# Altium PCB BLERADAR-V11.PcbDoc
Units mm, origin at the board's own origin, x right, y up, seen from the top; angles counter-clockwise.
Board outline 60 x 23 mm, 2 copper layers (Top Layer, Bottom Layer), stack 0.999 mm thick; 65 components, 35 nets, 254 pads, 39 vias.
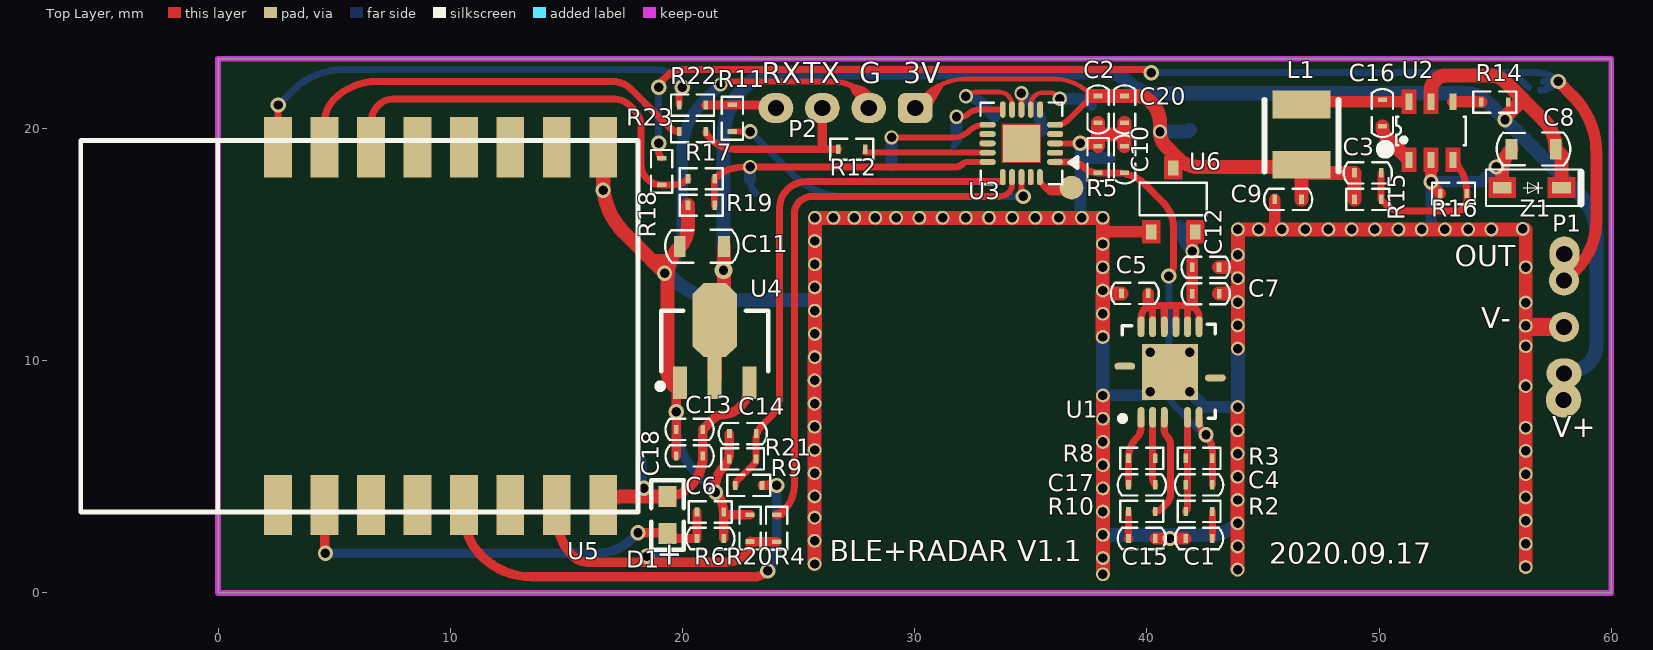
[diagram p0: Top Layer view]
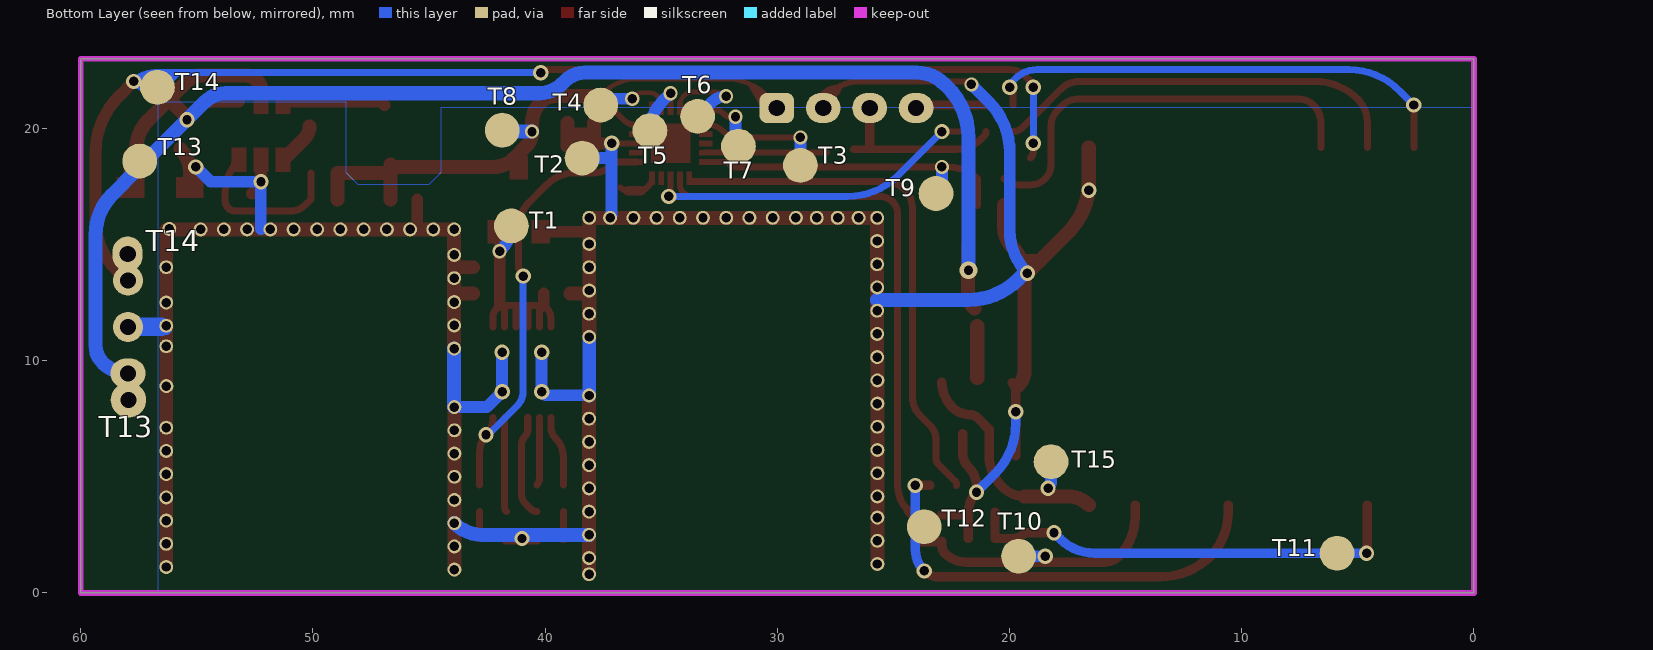
[diagram p1: Bottom Layer view, seen from below]

## Layer stack, top to bottom
Top Layer: signal copper 0.0356
Dielectric: core 0.928, FR-4, Dk 4.8
Bottom Layer: signal copper 0.0356

## Board outline
0,0 60,0 60,23 0,23

## Design rules (kind name [scope] priority, off if disabled: settings)
Clearance [All] p0: scope1count=1 scope1_0_kind=Board scope1_0_value=Board scope2count=1 scope2_0_kind=Board scope2_0_value=Board commentlength=0 gap=0.254
Clearance [All] p1: gap=0.254
ComponentClearance [All] p0: scope1count=1 scope1_0_kind=Board scope1_0_value=Board scope2count=1 scope2_0_kind=Board scope2_0_value=Board commentlength=0 gap=0.254 collisioncheckmode=3
ComponentClearance [All] p1: gap=0.254 collisioncheckmode=3 verticalgap=0.254
DiffPairsRouting [All] p0: scope1count=1 scope1_0_kind=Board scope1_0_value=Board scope2count=1 scope2_0_kind=Board scope2_0_value=Board commentlength=0
FanoutControl Fanout_BGA [All] p0 off: scope1count=1 scope1_0_kind=Board scope1_0_value=Board scope2count=1 scope2_0_kind=Board scope2_0_value=Board commentlength=69 // Protel DXP Scope 1 Expression Was: IsBGA   Fanout_BGA (Default Rule)
FanoutControl Fanout_LCC [All] p0 off: scope1count=1 scope1_0_kind=Board scope1_0_value=Board scope2count=1 scope2_0_kind=Board scope2_0_value=Board commentlength=69 // Protel DXP Scope 1 Expression Was: IsLCC   Fanout_LCC (Default Rule)
FanoutControl Fanout_SOIC [All] p0 off: scope1count=1 scope1_0_kind=Board scope1_0_value=Board scope2count=1 scope2_0_kind=Board scope2_0_value=Board commentlength=71 // Protel DXP Scope 1 Expression Was: IsSOIC   Fanout_SOIC (Default Rule)
FanoutControl Fanout_Small [All] p0 off: scope1count=1 scope1_0_kind=Board scope1_0_value=Board scope2count=1 scope2_0_kind=Board scope2_0_value=Board commentlength=84 // Protel DXP Scope 1 Expression Was: (CompPinCount < 5)   Fanout_Small (Default Rule)
FanoutControl Fanout_Default [All] p0: scope1count=1 scope1_0_kind=Board scope1_0_value=Board scope2count=1 scope2_0_kind=Board scope2_0_value=Board commentlength=30 // Fanout_Default (Default Rule)
Height [All] p0: scope1count=1 scope1_0_kind=Board scope1_0_value=Board scope2count=1 scope2_0_kind=Board scope2_0_value=Board commentlength=0
HoleSize [All] p0: scope1count=1 scope1_0_kind=Board scope1_0_value=Board scope2count=1 scope2_0_kind=Board scope2_0_value=Board commentlength=0 absolutevalues=TRUE maxlimit=2.54 minlimit=0.025 maxpercent=80.000 minpercent=20.000
LayerPairs [All] p0: scope1count=1 scope1_0_kind=Board scope1_0_value=Board scope2count=1 scope2_0_kind=Board scope2_0_value=Board commentlength=0 enforce=TRUE
PasteMaskExpansion [All] p0: scope1count=1 scope1_0_kind=Board scope1_0_value=Board scope2count=1 scope2_0_kind=Board scope2_0_value=Board commentlength=0 expansion=0
PlaneClearance [All] p0: scope1count=1 scope1_0_kind=Board scope1_0_value=Board scope2count=1 scope2_0_kind=Board scope2_0_value=Board commentlength=0 clearance=0.508
PlaneConnect [All] p0: scope1count=1 scope1_0_kind=Board scope1_0_value=Board scope2count=1 scope2_0_kind=Board scope2_0_value=Board commentlength=0 planeconnectstyle=Relief reliefexpansion=0.508 reliefentries=4 reliefconductorwidth=0.254 reliefairgap=0.254
PolygonConnect [All] p0: scope1count=1 scope1_0_kind=Board scope1_0_value=Board scope2count=1 scope2_0_kind=Board scope2_0_value=Board commentlength=0 connectstyle=Direct reliefconductorwidth=0.254 reliefentries=4 polygonreliefangle="90 Angle"
PolygonConnect [All] p1: connectstyle=Direct reliefconductorwidth=0.254 reliefentries=4 polygonreliefangle="90 Angle"
RoutingCorners [All] p0: scope1count=1 scope1_0_kind=Board scope1_0_value=Board scope2count=1 scope2_0_kind=Board scope2_0_value=Board commentlength=0 cornerstyle=45-Degree minsetback=2.54 maxsetback=2.54
RoutingLayers [All] p0: scope1count=1 scope1_0_kind=Board scope1_0_value=Board scope2count=1 scope2_0_kind=Board scope2_0_value=Board commentlength=0 top layer=Automatic bottom layer=Automatic
RoutingPriority [All] p0: scope1count=1 scope1_0_kind=Board scope1_0_value=Board scope2count=1 scope2_0_kind=Board scope2_0_value=Board commentlength=0
RoutingTopology [All] p0: scope1count=1 scope1_0_kind=Board scope1_0_value=Board scope2count=1 scope2_0_kind=Board scope2_0_value=Board commentlength=0 topology=Shortest
RoutingVias [All] p0: scope1count=1 scope1_0_kind=Board scope1_0_value=Board scope2count=1 scope2_0_kind=Board scope2_0_value=Board commentlength=0 holewidth=0.711 width=1.27 viastyle="Through Hole" minholewidth=0.711 minwidth=1.27 maxholewidth=0.711 maxwidth=1.27
RoutingVias [All] p1: holewidth=0.711 width=1.27 viastyle="Through Hole" minholewidth=0.711 minwidth=1.27 maxholewidth=0.711 maxwidth=1.27
ShortCircuit [All] p0: scope1count=1 scope1_0_kind=Board scope1_0_value=Board scope2count=1 scope2_0_kind=Board scope2_0_value=Board commentlength=0 allowed=FALSE
SolderMaskExpansion [All] p0: scope1count=1 scope1_0_kind=Board scope1_0_value=Board scope2count=1 scope2_0_kind=Board scope2_0_value=Board commentlength=0 expansion=0.102
SolderMaskExpansion [All] p1: expansion=0.102
TestPointUsage [All] p0: scope1count=1 scope1_0_kind=Board scope1_0_value=Board scope2count=1 scope2_0_kind=Board scope2_0_value=Board commentlength=0 valid=0 allowmultiple=FALSE
TestPointUsage [All] p1: valid=0 allowmultiple=FALSE
Testpoint [All] p0: scope1count=1 scope1_0_kind=Board scope1_0_value=Board scope2count=1 scope2_0_kind=Board scope2_0_value=Board commentlength=0 side=3 testpointundercomponent=TRUE minsize=1.016 maxsize=2.54 preferedsize=1.524 minholesize=0 maxholesize=1.016 preferedholesize=0.813 testpointgrid=0.025 style=297 order=0123456789
Testpoint [All] p1: side=3 testpointundercomponent=TRUE minsize=1.016 maxsize=2.54 preferedsize=1.524 minholesize=0 maxholesize=1.016 preferedholesize=0.813 testpointgrid=0.025 style=297 order=0123456789
UnRoutedNet [All] p0: scope1count=1 scope1_0_kind=Board scope1_0_value=Board scope2count=1 scope2_0_kind=Board scope2_0_value=Board commentlength=0
Width [All] p0: scope1count=1 scope1_0_kind=Board scope1_0_value=Board scope2count=1 scope2_0_kind=Board scope2_0_value=Board commentlength=0 maxlimit=1.524 minlimit=0.203 preferedwidth=0.254
Width [All] p1: maxlimit=1.524 minlimit=0.203 preferedwidth=0.254 toplayer_prefwidth=0.203 bottomlayer_minwidth=0.254 minimp=50.000000 maximp=50.000000 favimp=50.000000
18 further rules are at their usual default settings.

## Classes and differential pairs
component class BLE&RADAR-V10: C1 C2 C3 C4 C5 C6 C7 C8 C9 C10 C11 C12 C13 C14 C15 C16 C17 C18 C20 D1 L1 P1 P2 R2 R3 R4 R5 R6 R8 R9 R10 R11 R12 R14 R15 R16 R17 R18 R19 R20 R21 R22 R23 T1 T2 T3 T4 T5 T6 T7 T8 U1 U2 U3 U4 U5 U6 Z1

## Components (designator, comment, footprint, x,y, rotation, side; value= is the part's Value field where it differs from the comment)
C1 "4.7uF" C0402 42.823,2.338 r180 top
C2 "10uF" C0402 37.898,21.395 r270 top
C3 "22pF" C0402 50.09,18.086 r180 top
C4 "1nF" C0402 42.823,4.648 r180 top
C5 "0.5pF" C0402 40.057,12.895 r180 top
C6 "0.1uF" C0402 20.626,2.338 r0 top
C7 "0.1uF" C0402 41.962,12.879 r0 top
C8 "10uF/16V" C0603 57.583,19.102 r180 top
C9 "10uF" C0402 46.661,16.943 r180 top
C10 "0.1uF" C0402 39.041,18.086 r90 top
C11 "10uF/16V" C0603 21.769,14.911 r180 top (schematic designator C8)
C12 "10uF" C0402 41.957,14.022 r0 top
C13 "10uF" C0402 20.88,7.037 r180 top (schematic designator C5)
C14 "1uF" C0402 22.023,6.859 r0 top
C15 "1nF" C0402 40.359,2.338 r180 top
C16 "0.1uF" C0402 50.144,21.237 r270 top
C17 "1nF" C0402 40.359,4.648 r180 top
C18 "0.1uF" C0402 20.88,5.894 r180 top (schematic designator C5)
C20 "0.1uF" C0402 39.041,20.245 r90 top
D1 "PT19-21C" LED-0603 19.356,3.354 r90 top
L1 "PRS3015-100MT" PRS3015 46.661,21.134 r270 top
P1 "PH2.0-3P" PH2.0-3P 57.964,9.45 r90 top
P2 "PH2.0-4P" PH2.0-5P 30.024,20.88 r180 top (schematic designator P1)
R2 "2k" R0402 42.823,3.505 r180 top
R3 "1M" R0402 42.823,5.791 r180 top
R4 "100" R0402 24.055,3.354 r270 top
R5 "47k" R0402 37.898,18.086 r90 top
R6 "47k" R0402 20.626,3.481 r0 top
R8 "5.1k" R0402 40.359,5.791 r180 top
R9 "10k" R0402 22.277,4.624 r0 top
R10 "5.1k" R0402 40.359,3.505 r180 top
R11 "1K" R0402 22.15,19.864 r90 top
R12 "1K" R0402 27.865,19.102 r180 top
R14 "47k" R0402 54.408,21.134 r0 top
R15 "47k" R0402 50.09,16.943 r180 top
R16 "12k" R0402 52.63,17.197 r0 top
R17 "1K" R0402 21.388,17.832 r180 top (schematic designator R12)
R18 "1K" R0402 19.102,18.721 r270 top (schematic designator R12)
R19 "10k" R0402 21.388,16.689 r180 top (schematic designator R12)
R20 "10k" R0402 22.912,2.211 r90 top (schematic designator R12)
R21 "12k" R0402 23.166,5.767 r180 top (schematic designator R12)
R22 "NC" R0402 21.007,21.007 r180 top (schematic designator R12)
R23 "NC" R0402 21.007,19.864 r180 top (schematic designator R12)
T1 "" TestPoints#1 41.454,15.8 r180 bottom
T2 "" TestPoints#1 38.406,18.721 r180 bottom
T3 "" TestPoints#2 29.008,18.721 r180 bottom
T4 "" TestPoints#3 36.12,21.007 r180 bottom
T5 "" TestPoints#4 35.485,19.864 r180 bottom
T6 "" TestPoints#5 33.453,20.499 r180 bottom
T7 "" TestPoints#1 31.675,19.229 r180 bottom
T8 "" TestPoints#6 39.295,16.689 r270 bottom
T9 "" TestPoints#1 23.166,17.197 r180 bottom (schematic designator T1)
T10 "" TestPoints#1 19.61,1.576 r180 bottom (schematic designator T1)
T11 "" TestPoints#1 5.894,1.703 r180 bottom (schematic designator T1)
T12 "" TestPoints#1 23.674,2.846 r180 bottom (schematic designator T1)
T13 "" TestPoints#1 57.46,18.594 r180 bottom (schematic designator T2)
T14 "" TestPoints#1 56.698,21.769 r180 bottom (schematic designator T2)
T15 "" TestPoints#1 18.213,5.64 r180 bottom (schematic designator T1)
U1 "XBR816" XBR816 44,8.008 r90 top
U2 "SY8120B1ABC" SOT-23-6 51.287,18.645 r90 top
U3 "HC89S003F4" QFN20(3*3) 34.596,19.356 r180 top
U4 "ME6208A33PG" SOT89N 21.388,10.847 r90 top (schematic designator U18)
U5 "BT3L" ZS3L 18.086,3.481 r90 top
U6 "ME6216A12M3G" SOT-23-L 40.184,15.546 r90 top
Z1 "SESD3Z12C" SOD-323 55.297,17.451 r0 top

## Footprints (in the part's own frame and the unit in brackets; to place one, negate y for a bottom-side part, rotate by r counter-clockwise, add the part's x,y. Pads: shape width x height; smd on the part's side, far side on the other; paste and mask are expansions set on the pad)
C0402 [mm]
  rect 0.2x0.4 smd: 1(0,0) 2(1.15,0)
  silkscreen extent -0.46,-0.46 1.61,0.46
C0603 [mil]
  rect 19.8x35.55 smd: 1(-0.92,0) 2(74,0)
  silkscreen extent -25,-28 99,28
LED-0603 [mm]
  rect 0.9x0.762 smd: 1(-0.8,0) 2(0.8,0)
  silkscreen extent -1.5,-0.7 1.5,0.7
PH2.0-3P [mm]
  oval 1.3x1.5 hole 0.7: 1(0,0)
  round 1.3 hole 0.7: 2(2,0) 3(4,0)
PH2.0-5P [mm]
  rrect50% 1.5x1.3 hole 0.7: 1(0,0)
  oval 1.5x1.3 hole 0.7: 2(2,0) 3(4,0) 4(6,0)
PRS3015 [mm]
  rect 1.2x2.5 smd: 1(0.1,0) 2(2.7,0)
  silkscreen extent -0.1,-1.6 3,1.6
QFN20(3*3) [mm]
  rect 1.6x1.6 smd: 0(0,0)
  oval 0.7x0.25 smd: 1(-1.45,0.8) 2(-1.45,0.4) 3(-1.45,0) 4(-1.45,-0.4) 5(-1.45,-0.8) 11(1.45,-0.8) 12(1.45,-0.4) 13(1.45,0) 14(1.45,0.4) 15(1.45,0.8)
  oval 0.25x0.7 smd: 6(-0.8,-1.45) 7(-0.4,-1.45) 8(0,-1.45) 9(0.4,-1.45) 10(0.8,-1.45) 16(0.8,1.45) 17(0.4,1.45) 18(0,1.45) 19(-0.4,1.45) 20(-0.8,1.45)
  Top Layer region: -1.8,-0.675 -1.8,-0.925 -1.219,-0.925 -1.219,-0.675
  Top Layer region: -1.8,-0.275 -1.8,-0.525 -1.219,-0.525 -1.219,-0.275
  Top Layer region: -1.8,0.125 -1.8,-0.125 -1.219,-0.125 -1.219,0.125
  Top Layer region: -1.8,0.525 -1.8,0.275 -1.219,0.275 -1.219,0.525
  Top Layer region: -1.8,0.925 -1.8,0.675 -1.219,0.675 -1.219,0.925
  Top Layer region: -0.675,1.8 -0.925,1.8 -0.925,1.219 -0.675,1.219
  Top Layer region: -0.275,1.8 -0.525,1.8 -0.525,1.219 -0.275,1.219
  Top Layer region: 0.125,1.8 -0.125,1.8 -0.125,1.219 0.125,1.219
  Top Layer region: 0.525,1.8 0.275,1.8 0.275,1.219 0.525,1.219
  Top Layer region: 0.925,1.8 0.675,1.8 0.675,1.219 0.925,1.219
  Top Layer region: 1.8,0.675 1.8,0.925 1.219,0.925 1.219,0.675
  Top Layer region: 1.8,0.275 1.8,0.525 1.219,0.525 1.219,0.275
  Top Layer region: 1.8,-0.125 1.8,0.125 1.219,0.125 1.219,-0.125
  Top Layer region: 1.8,-0.525 1.8,-0.275 1.219,-0.275 1.219,-0.525
  Top Layer region: 1.8,-0.925 1.8,-0.675 1.219,-0.675 1.219,-0.925
  Top Layer region: 0.675,-1.8 0.925,-1.8 0.925,-1.219 0.675,-1.219
  Top Layer region: 0.275,-1.8 0.525,-1.8 0.525,-1.219 0.275,-1.219
  Top Layer region: -0.125,-1.8 0.125,-1.8 0.125,-1.219 -0.125,-1.219
  Top Layer region: -0.525,-1.8 -0.275,-1.8 -0.275,-1.219 -0.525,-1.219
  Top Layer region: -0.85,-0.85 0.85,-0.85 0.85,0.85 -0.85,0.85
  Top Layer region: -0.925,-1.8 -0.675,-1.8 -0.675,-1.219 -0.925,-1.219
  silkscreen extent -2.43,-1.76 1.76,1.76
R0402 [mm]
  rect 0.2x0.4 smd: 1(0,0) 2(1.15,0)
  silkscreen extent -0.35,-0.46 1.5,0.46
SOD-323 [mm]
  rect 0.8x0.5 smd: A(0,0) K(2.56,0)
  Top Layer region: -0.594,-0.452 0.601,-0.452 0.601,0.451 -0.594,0.451
  Top Layer region: 1.958,-0.452 3.161,-0.452 3.161,0.451 1.958,0.451
  silkscreen extent -0.69,-0.8 3.4,0.78
SOT89N [mm] "SOT89, 3-Leads, Body 4.5x2.4 mm, Pitch 1.5mm, Lead Span 4.1mm, IPC Medium Density"
  rect 1.4x0.6 smd: 1(-1.8,1.5) 3(-1.8,-1.5)
  rect 1.8x0.6 smd: 2(-1.6,0)
  oct 3.2x1.9 smd: 2(0.9,0)
  silkscreen extent -2.07,-2.3 1.3,2.47
SOT-23-6 [mm]
  rect 0.7x0.3 smd: 1(0,0) 2(0,-0.95) 3(0,-1.9) 4(2.5,-1.9) 5(2.5,-0.95) 6(2.5,0)
  Top Layer region: -0.526,-0.325 0.527,-0.325 0.527,0.328 -0.526,0.328
  Top Layer region: -0.527,-1.276 0.526,-1.276 0.526,-0.623 -0.527,-0.623
  Top Layer region: -0.527,-2.226 0.526,-2.226 0.526,-1.573 -0.527,-1.573
  Top Layer region: 1.973,-0.325 3.026,-0.325 3.026,0.328 1.973,0.328
  Top Layer region: 1.972,-1.276 3.025,-1.276 3.025,-0.623 1.972,-0.623
  silkscreen extent 0.63,-2.45 1.86,0.54
SOT-23-L [mm]
  rect 0.65x0.45 smd: 1(0,0) 2(0,-1.9) 3(2.757,-0.95)
  Top Layer region: -0.501,-0.401 0.502,-0.401 0.502,0.402 -0.501,0.402
  Top Layer region: -0.501,-2.306 0.502,-2.306 0.502,-1.503 -0.501,-1.503
  Top Layer region: 2.256,-1.362 3.259,-1.362 3.259,-0.559 2.256,-0.559
  silkscreen extent 0.71,-2.4 2.11,0.5
TestPoints#1 [mm] "TestPoints"
  round 1.5 smd: 1(0,0)
TestPoints#2 [mm] "TestPoints"
  round 1.5 smd: 1(0,-0.314)
TestPoints#3 [mm] "TestPoints"
  round 1.5 smd: 1(-1.485,0)
TestPoints#4 [mm] "TestPoints"
  round 1.5 smd: 1(0,0.038)
TestPoints#5 [mm] "TestPoints"
  round 1.5 smd: 1(0.02,0.02)
TestPoints#6 [mm] "TestPoints"
  round 1.5 smd: 1(-3.236,-2.555)
XBR816 [mm] "QFN24"
  oval 0.9x0.3 smd: 1(-0.45,4.25) 2(-0.45,3.75) 3(-0.45,3.25) 5(-0.45,2.25) 6(-0.45,1.75) 13(3.45,1.75) 14(3.45,2.25) 15(3.45,2.75) 16(3.45,3.25) 17(3.45,3.75) 18(3.45,4.25)
  oval 0.3x0.9 smd: 10(1.25,1.05) 21(1.75,4.95)
  rect 2.4x2.4 smd: 25(1.5,3)
  silkscreen extent -0.61,1.05 3.55,5.16
ZS3L [mm]
  rect 2.6x1.2 smd: 1(0.3,15.5) 2(0.3,13.5) 3(0.3,11.5) 4(0.3,9.5) 5(0.3,7.5) 6(0.3,5.5) 7(0.3,3.5) 8(0.3,1.5) 9(15.7,1.5) 10(15.7,3.5) 11(15.7,5.5) 12(15.7,7.5) 13(15.7,9.5) 14(15.7,11.5) 15(15.7,13.5) 16(15.7,15.5)
  silkscreen extent 0,0 16,24

## Part data
C1 C2 C3 C4 C5 C6 C7 C8 C9 C10 C11 C12 C13 C14 C15 C16 C17 C18 C20: library part Cap, "Capacitor"
D1: library part "Photo Sen", "Photosensitive Diode"
L1: library part Inductor, "Inductor"
P1: library part "Header 3", "Header, 3-Pin"
P2: library part CON5, "Connector"
R2 R3 R4 R5 R6 R8 R9 R10 R11 R12 R14 R15 R16 R17 R18 R19 R20 R21 R22 R23: library part Res2, "Resistor"
T1 T2 T3 T4 T5 T6 T7 T8 T9 T10 T11 T12 T13 T14 T15: library part TestPoints, "TestPoints"
U1: library part XBR1000_24_1
U2: library part H9108
U3: "MCU"
U4: library part ME6208A50PG
U6: library part SSP6206
Z1: library part "D Zener", "Zener Diode"

## Free pads (board coordinates)
  round 1.016 smd: 0(36.755,17.451)
  round 1.524 hole 0.7: 0(57.948,8.307)
  oval 1.3x1.5 hole 0.7: 0(57.98,14.593)
  round 0.6 hole 0.406: 1(25.691,1.24) 1(25.691,2.24) 1(25.691,3.24) 1(25.691,4.15) 1(25.691,5.15) 1(25.691,6.15) 1(25.691,7.15) 1(25.691,8.15) 1(25.691,9.15) 1(25.7,10.15) 1(25.7,11.15) 1(25.7,12.15) 1(25.7,13.15) 1(25.7,14.15) 1(25.7,15.15) 1(25.7,16.15) 1(26.501,16.15) 1(27.401,16.15) 1(28.301,16.15) 1(29.201,16.15) 1(30.201,16.15) 1(31.201,16.15) 1(32.201,16.15) 1(33.201,16.15) 1(34.201,16.15) 1(35.201,16.15) 1(36.201,16.15) 1(37.201,16.15) 1(38.101,11.018) 1(38.101,12.018) 1(38.101,13.018) 1(38.101,14.018) 1(38.101,15.022) 1(38.101,16.15) 1(38.109,0.8) 1(38.109,1.498) 1(38.109,2.498) 1(38.109,3.498) 1(38.109,4.498) 1(38.109,5.498) 1(38.109,6.498) 1(38.109,7.498) 1(38.109,8.498) 1(43.909,0.998) 1(43.909,1.998) 1(43.909,2.998) 1(43.909,3.998) 1(43.909,4.998) 1(43.909,5.998) 1(43.909,6.998) 1(43.909,7.998) 1(43.917,13.55) 1(43.917,14.55) 1(43.917,15.65) 1(43.917,10.518) 1(43.917,11.518) 1(43.917,12.518) 1(44.817,15.65) 1(45.817,15.65) 1(46.817,15.65) 1(47.817,15.65) 1(48.817,15.65) 1(49.82,15.65) 1(50.836,15.65) 1(51.836,15.65) 1(52.836,15.65) 1(53.836,15.65) 1(54.836,15.65) 1(56.186,15.673) 1(56.313,8.9) 1(56.317,1.11) 1(56.317,2.11) 1(56.317,3.11) 1(56.317,4.11) 1(56.317,5.11) 1(56.317,6.11) 1(56.317,7.11) 1(56.317,10.618) 1(56.317,11.5) 1(56.317,12.5) 1(56.317,14.022)

## Via types
v1: diameter 0.66, hole 0.406, Top Layer to Bottom Layer, tented both sides, 29 vias
v2: diameter 0.61, hole 0.406, Top Layer to Bottom Layer, tented both sides, 9 vias
v3: diameter 0.762, hole 0.4, Top Layer to Bottom Layer, tented both sides, 1 vias

## Nets (pads, with @x,y where several pads share a name; then routed paths per layer and width w, separated by ;. In a path a pad name is that pad's centre, name@x,y a point inside that pad or via, vN(x,y) a via of type N, cw(c..) or ccw(c..) an arc to the next point about the centre after c; other vN are vias at no path point)
1.2V: C5.1 C7.1 C12.1 T1.1 U1.13 U1.14 U1.15 U1.16 U1.17 U1.18 U6.2 | length 11.9
  Top Layer w0.305: U1.18 39.75,11.809 cw(c40.365,11.809) 39.93,12.244 39.967,12.281 cw(c40.184,12.064) 40.184,12.371 41.835,12.371 cw(c41.835,12.064) 42.052,12.281 42.089,12.244 cw(c41.7,11.855) 42.25,11.855 U1.13 ; U1.17 40.25,12.305 ; U1.16 40.75,12.302 ; U1.15 41.25,12.321 ; U1.14 41.75,12.286
  Top Layer w0.508: 40.057,12.371 C5.1 ; 41.957,12.396 U6.2@41.957,15.292
  Bottom Layer w0.508: T1.1 ccw(c42.864,15.8) 41.867,14.803 v2(41.962,14.708)
3.3V: C13.1 C18.1 D1.2 T15.1 U4.3 U5.8 | length 10.9
  Top Layer w0.406: D1.2 ccw(c19.356,5.472) 20.288,4.54 20.341,4.593 ccw(c19.04,5.894) C18.1 C13.1 21.379,7.536 cw(c21.707,7.208) 21.707,7.672 ccw(c21.707,8.741) 22.463,7.985 ccw(c21.379,9.069) U4.3@22.912,9.069
  Top Layer w0.6: U5.8 cw(c17.487,2.88) 17.487,4.154 D1.2
  Bottom Layer w0.508: T15.1 18.213,4.804 ccw(c18.647,4.804) v1(18.34,4.497)
3V: C2.1 C3.2 C9.1 C20.2 L1.2 P2.1 R15.2 T8.1 U3.5 U6.3 | length 28.9
  Top Layer w0.203: P2.1@30.449,21.406 cw(c32.183,19.672) 32.183,22.125 36.074,22.125 cw(c36.074,20.174) 37.453,21.553 ; P2.1@30.532,21.134 30.913,21.769 ; P2.1@30.659,21.007 31.167,21.896
  Top Layer w0.254: P2.1 P2.1@30.449,21.305 ; U3.5 36.107,20.156 ccw(c36.107,20.893) 36.628,20.372 37.631,21.375 ; 37.631,21.375 ccw(c37.61,21.395) 37.639,21.395 cw(c37.61,21.395) 37.631,21.375
  Top Layer w0.61: 37.639,21.395 39.554,21.395 cw(c39.554,20.504) 40.184,21.134 cw(c39.264,20.214) 40.565,20.214 v2(40.565,19.864) ccw(c41.485,19.864) 40.834,19.214 41.327,18.721 ccw(c42.247,19.641) 42.247,18.34 46.407,18.34 ccw(c47.02,18.953) 47.02,18.086 C3.2 R15.2 ; C9.1 L1.2
  Bottom Layer w0.61: v2(40.565,19.864) 41.703,19.864 ccw(c41.703,20.072) T8.1
+10V: C8.1 C11.1 P1.1 pad.0@57.948,8.307 R14.2 T13.1 U2.5 U4.2 Z1.K | length 70.8
  Top Layer w0.61: U4.2@21.388,9.247 U4.2@21.388,11.482 ; U4.2@21.515,12.244 ccw(c20.845,12.914) 21.792,12.914 C11.1 ; U2.5 52.237,21.687 cw(c52.712,21.687) 52.376,22.023 52.45,22.097 cw(c52.884,21.664) 52.884,22.277 54.758,22.277 cw(c54.758,21.283) 55.461,21.986 57.084,20.363 cw(c55.823,19.102) C8.1 57.857,18.851 Z1.K ; v1(55.424,20.372) cw(c55.691,20.372) 55.502,20.561 56.194,21.253
  Bottom Layer w0.61: v3(21.769,13.895) 21.769,19.61 cw(c24.835,19.61) 22.667,21.778 22.785,21.896 cw(c24.011,20.67) 24.011,22.404 38.279,22.404 cw(c38.279,21.178) 39.146,22.045 39.258,21.933 ccw(c40.267,22.943) 40.267,21.515 53.746,21.515 cw(c53.746,20.214) 54.666,21.134 57.593,18.207 58.64,17.16 cw(c56.898,15.419) 59.361,15.419 59.361,10.655 cw(c58.292,10.655) 59.048,9.899 cw(c57.964,10.983) P1.1
GND: C1.2 C2.2 C5.2 C6.2 C7.2 C8.2 C9.2 C10.2 C11.2 C12.2 C13.2 C14.1 C15.1 C18.2 C20.1 P1.2 P2.2 pad.1 R5.2 R6.2 R16.1 R19.2 R20.2 R21.2 T2.1 U1.25 U2.2 U3.3 U4.1 U5.9 U6.1 Z1.A | length 179.2
  Top Layer w0.254: v2(21.642,21.896) cw(c21.949,21.589) 21.949,22.023 26.456,22.023 cw(c26.456,20.155) 27.777,21.476 cw(c27.181,20.88) P2.2 ; P2.2@27.865,21.134 27.447,21.552 cw(c27.664,21.769) 27.357,21.769 cw(c27.357,20.849) P2.2@28.007,21.5 ; U3.3 v1(37.136,19.356) ; 37.608,19.356 cw(c37.608,18.946) R5.2
  Top Layer w0.406: U4.1@19.619,8.933 cw(c19.352,8.666) U4.1@19.73,8.666 ; C18.2 U4.1@19.73,8.666 ; U4.1 ccw(c20.269,8.666) U4.1@19.73,8.666 ; C6.2 R6.2 ; C14.1 22.023,6.041 cw(c21.138,6.041) 21.764,5.416 ccw(c22.59,4.59) 21.422,4.59 v1(21.422,4.336) cw(c20.596,3.51) 21.764,3.51 ccw(c21.805,3.51) R6.2 ; R20.2 22.066,3.361 cw(c22.066,3.771) R6.2
  Top Layer w0.508: v1(37.136,19.356) 37.608,19.356 ; 38.101,15.546 U6.1 ; C15.1 C1.2 ; 45.391,15.65 ccw(c45.101,15.94) 45.511,15.94 C9.2 ; 45.511,15.667 ccw(c45.535,15.667) pad.1@45.518,15.65 ; U2.2 52.237,17.59 R16.1
  Top Layer w0.6: pad.1@25.691,1.24 pad.1@25.691,10.15 ; pad.1@25.7,10.15 25.7,16.15 38.101,16.15 pad.1@38.101,12.895 ; R5.2 C2.2 ; 37.898,19.737 39.041,19.737 ; pad.1@38.109,0.814 pad.1@38.109,8.498 ; C10.2 C20.1 ; C12.2 43.917,14.022 ; pad.1@43.909,0.998 pad.1@43.909,7.998 ; pad.1@43.917,10.518 pad.1@43.917,12.518 ; pad.1@43.917,12.55 43.917,15.65 56.317,15.65 pad.1@56.317,1.11
  Top Layer w0.61: U5.9 16.586,17.681 ccw(c19.652,17.681) 17.484,15.513 v1(19.229,13.768) ; 18.722,14.275 cw(c18.723,14.274) 18.723,14.276 19.483,14.276 ; U4.1@19.619,8.933 cw(c20.255,9.568) 19.356,9.568 19.356,13.623 cw(c21.177,13.623) C11.2 ccw(c19.048,15.753) 20.238,15.753 R19.2 ; pad.1@38.101,11.018 38.101,12.895 C5.2 ; C7.2@43.112,12.895 43.901,12.895 ; Z1.A 55.297,18.121 cw(c56.685,18.121) C8.2
  Top Layer w0.762: pad.1@56.395,11.45 P1.2
  Bottom Layer w0.406: v1(19.73,7.799) 19.73,7.298 ccw(c22.796,7.298) 20.628,5.13 v1(21.422,4.336)
  Bottom Layer w0.508: v1(19.229,13.768) ccw(c17.389,15.608) 19.991,15.608 19.991,18.975 cw(c23.057,18.975) 20.889,21.143 v2(21.642,21.896) ; 37.136,18.721 T2.1 ; v1(37.136,19.356) 37.136,16.308 ccw(c37.359,16.308) pad.1@37.201,16.15 ; pad.1@38.101,8.506 39.99,8.506 40.153,8.669 v1(40.153,10.363) ; v1(41.855,10.355) 41.855,8.661 42.518,7.998 pad.1@43.909,7.998 ; 52.249,15.673 52.249,17.705 54.408,17.705 v1(55.043,18.34) ; pad.1@56.317,11.364 cw(c56.525,11.156) pad.1@56.525,11.45
  Bottom Layer w0.6: pad.1@38.101,8.506 pad.1@38.101,11.018 ; pad.1@38.109,2.498 42.702,2.498 ccw(c42.702,4.205) pad.1@43.909,2.998 ; pad.1@43.917,8.006 pad.1@43.917,10.518
  Bottom Layer w0.61: v1(19.229,13.768) cw(c19.229,13.461) 19.446,13.678 19.616,13.508 ccw(c21.784,15.676) 21.784,12.61 25.7,12.61
  Bottom Layer w0.8: pad.1@56.525,11.45 P1.2
  other v1: 40.997,2.338 40.145,8.661 41.847,8.653 16.58,17.342 52.237,17.705
LIGHT_CHECK: C6.1 D1.1 R6.1 T11.1 U5.2 | length 19.6
  Top Layer w0.406: U5.2 4.586,1.795 ccw(c4.716,1.795) v1(4.624,1.703) ; v1(18.086,2.592) 19.264,2.592 cw(c19.264,2.462) D1.1 ccw(c19.877,3.075) 19.877,2.338 C6.1 R6.1
  Bottom Layer w0.406: v1(4.624,1.703) 16.321,1.703 ccw(c16.321,3.818) 17.817,2.323 v1(18.086,2.592)
NetC1_1: C1.1 R2.1 | length 1.2
  Top Layer w0.305: C1.1 R2.1
NetC3_1: C3.1 R15.1 R16.2 U2.3 | length 7.4
  Top Layer w0.305: C3.1 R15.1 50.329,16.704 ccw(c50.979,17.355) 50.979,16.435 53.339,16.435 ccw(c53.339,16.869) 53.646,16.562 ccw(c53.322,16.886) 53.78,16.886 53.78,17.213 ccw(c51.755,17.213) U2.3
  Top Layer w0.508: U2.3 cw(c52.971,18.429) U2.3@53.276,18.429
NetC4_1: C4.1 C10.1 R3.1 R5.1 U1.6 U3.1 | length 19.2
  Top Layer w0.305: U3.1 36.742,18.556 cw(c36.742,17.819) 37.263,18.34 ccw(c37.876,18.953) 37.876,18.086 38.27,18.086 38.704,18.086 cw(c38.704,16.352) 39.93,17.578 40.7,16.808 cw(c39.616,15.724) 41.149,15.724 41.149,14.132 cw(c40.455,14.132) v1(40.946,13.641) v1@40.946,13.661 ; U1.6 42.25,7.462 ccw(c43.175,7.462) 42.521,6.808 cw(c41.792,6.079) 42.823,6.079 C4.1
  Bottom Layer w0.305: v1(40.946,13.641) 40.946,8.688 ccw(c41.866,8.688) 41.215,8.038 42.373,6.88 ccw(c42.546,7.054) v1(42.546,6.808)
NetC4_2: C4.2 R2.2 R3.2 U1.5 | length 4.1
  Top Layer w0.305: R2.2 ccw(c41.486,3.691) 41.75,3.691 U1.5
NetC14_2: C14.2 R9.1 R21.1 U3.16 | length 23
  Top Layer w0.305: R9.1 cw(c22.584,4.624) 22.367,4.841 23.076,5.55 ; U3.16@33.707,17.705 25.325,17.705 ccw(c25.325,16.562) 24.182,16.562 24.182,8.434 cw(c23.055,8.434) 23.852,7.637 23.425,7.21 ccw(c24.051,6.585) 23.166,6.585 R21.1 ; 23.076,5.55 ccw(c22.859,5.767) R21.1 ; 23.076,5.55 ccw(c22.859,5.767) R21.1
NetC15_2: C15.2 R10.2 | length 1.2
  Top Layer w0.305: C15.2 R10.2
NetC16_1: C16.1 L1.1 U2.6 | length 4.4
  Top Layer w0.508: L1.1@46.915,21.007 47.053,21.145 U2.6
NetC16_2: C16.2 U2.1 | length 1.9
  Top Layer w0.6: C16.2 ccw(c50.867,20.087) 50.356,19.576 U2.1
NetC17_1: C17.1 R8.1 U1.2 | length 2.9
  Top Layer w0.305: U1.2 40.25,4.911 ccw(c40.622,4.911) C17.1
NetC17_2: C17.2 R8.2 U1.1 | length 3.1
  Top Layer w0.305: C17.2 39.209,5.835 cw(c40.37,5.835) 39.549,6.656 ccw(c39.064,7.141) 39.75,7.141 U1.1
NetP1_3: P1.3 pad.0@57.98,14.593 R18.1 T14.1 | length 54.7
  Top Layer w0.305: v1(18.975,19.356) 18.975,19.028 ccw(c19.409,19.028) R18.1 ; v1(18.975,21.769) cw(c19.282,21.769) 19.065,21.986 19.356,22.277 cw(c19.969,21.664) 19.969,22.531 39.877,22.531 cw(c39.877,22.097) v1(40.184,22.404)
  Top Layer w0.508: v1(57.714,22.023) 58.347,21.39 cw(c55.902,18.944) 59.361,18.944 59.361,16.054 cw(c56.295,16.054) 58.463,13.886 58.072,13.495 cw(c57.964,13.602) P1.3
  Bottom Layer w0.305: v1(18.975,19.356) v1(18.975,21.769) ; v1(40.184,22.404) T14.1@56.821,22.404 ; 55.805,22.404 T14.1@56.44,21.769 ; T14.1@56.794,22.404 cw(c56.794,21.103) v1(57.714,22.023) ; T14.1@56.948,21.642 ccw(c56.948,22.571) v1@57.605,21.914 ; T14.1@57.079,22.023 v1(57.714,22.023) ; T14.1@57.28,21.843 cw(c57.714,21.41) v1(57.714,22.023)
NetP2_3: P2.3 R12.2 R23.1 | length 7.6
  Top Layer w0.305: R23.1 ccw(c21.248,19.864) 21.078,19.693 21.259,19.512 ccw(c22.249,20.502) 22.249,19.102 R12.2
  Top Layer w0.406: 26.024,19.254 P2.3
NetP2_4: P2.4 R11.2 R22.1 | length 3.1
  Top Layer w0.406: R22.1 23.717,21.007 cw(c23.717,20.573) P2.4
NetR4_1: R4.1 U3.17 | length 23.7
  Top Layer w0.254: 33.633,17.07 ccw(c33.633,17.677) 34.063,17.248 ccw(c33.741,17.57) 34.196,17.57 U3.17
  Top Layer w0.305: 24.368,3.54 ccw(c23.284,4.624) 24.817,4.624 24.817,16.308 cw(c25.579,16.308) 25.579,17.07 33.633,17.07
  Top Layer w0.406: R4.1 ccw(c24.055,3.661) 24.272,3.444 24.368,3.54
NetR4_2: R4.2 R20.1 T10.1 U5.7 | length 12.9
  Top Layer w0.406: U5.7 14.586,3.28 ccw(c16.996,3.28) 15.292,1.576 ccw(c15.905,2.189) 15.905,1.322 21.865,1.322 ccw(c21.865,2.623) 22.785,1.703 ccw(c22.478,2.01) 22.912,2.01 R20.1 ccw(c22.929,2.228) 22.929,2.204 R4.2
  Bottom Layer w0.508: v1(18.467,1.576) T10.1
NetR9_2: R9.2 T12.1 U5.5 | length 19.4
  Top Layer w0.406: U5.5 10.586,3.433 ccw(c13.212,3.433) 11.355,1.576 ccw(c13.501,3.722) 13.501,0.687 23.061,0.687 ccw(c23.061,1.554) v1(23.674,0.941) ; R9.2 v1(24.055,4.624)
  Bottom Layer w0.406: v1(23.674,0.941) ccw(c22.754,1.861) 24.055,1.861 v1(24.055,4.624)
NetR10_1: R10.1 U1.3 | length 4.4
  Top Layer w0.305: R10.1 ccw(c40.359,3.876) 40.622,3.614 40.819,3.811 ccw(c40.328,4.302) 41.022,4.302 41.022,6.364 ccw(c40.502,6.364) 40.87,6.732 cw(c41.159,7.021) 40.75,7.021 U1.3
NetR11_1: R11.1 U3.18 | length 14.5
  Top Layer w0.254: R11.1 v1(22.912,19.864) ; U3.18@34.596,17.959 34.596,17.254 ccw(c34.856,17.254) v1(34.672,17.07)
  Bottom Layer w0.305: v1(22.912,19.864) 24.808,17.968 ccw(c26.976,20.136) 26.976,17.07 v1(34.672,17.07)
NetR12_1: R12.1 U3.14 | length 5.3
  Top Layer w0.254: R12.1@27.865,18.956 U3.14
NetR14_1: R14.1 U2.4 | length 1.2
  Top Layer w0.508: U2.4 54.382,21.145 cw(c54.382,21.108) R14.1
NetR17_1: R17.1 R19.1 T9.1 U3.15 | length 14.3
  Top Layer w0.254: 32.056,18.467 cw(c32.271,18.252) 32.271,18.556 U3.15
  Top Layer w0.305: R19.1 R17.1 cw(c22.614,16.606) 22.614,18.34 31.749,18.34 ccw(c31.749,18.774) 32.056,18.467
  Bottom Layer w0.305: T9.1@22.912,17.81 ccw(c23.779,17.81) T9.1
  Bottom Layer w0.508: T9.1@22.912,17.81 v2(22.912,18.34)
NetR17_2: R17.2 R18.2 U5.14 | length 18.2
  Top Layer w0.305: U5.14 6.586,20.225 cw(c7.692,20.225) 6.91,21.007 cw(c7.523,20.394) 7.523,21.261 16.987,21.261 17.092,21.261 cw(c17.092,20.394) 17.705,21.007 17.944,20.768 cw(c17.293,20.118) 18.213,20.118 18.213,18.445 ccw(c19.08,18.445) 18.467,17.832 ccw(c19.097,18.462) R18.2@19.097,17.571 ; R18.2 19.608,17.571 ccw(c19.608,18.462) R17.2
NetR22_2: R22.2 U5.16 | length 20.9
  Top Layer w0.305: U5.16 v1@2.586,20.993 ; R22.2 19.857,21.445 cw(c20.315,21.445) v1(19.991,21.769) ; v1@2.586,20.993 cw(c2.606,20.993) v1(2.592,21.007) ccw(c2.606,20.993) v1@2.586,20.993
  Bottom Layer w0.305: v1(2.592,21.007) 3.218,21.633 cw(c5.386,19.465) 5.386,22.531 18.817,22.531 cw(c18.817,21.23) 19.737,22.15 19.901,21.986 cw(c19.684,21.769) v1(19.991,21.769)
NetR23_2: R23.2 U5.15 | length 18.1
  Top Layer w0.305: U5.15 4.586,20.249 cw(c6.017,20.249) 5.005,21.261 cw(c6.845,19.421) 6.845,22.023 16.754,22.023 16.987,22.023 cw(c16.987,20.902) 17.779,21.695 18.938,20.536 19.435,20.039 ccw(c19.857,20.46) R23.2
NetT3_1: T3.1 U3.11 | length 5.5
  Top Layer w0.254: v2(29.008,19.61) 31.697,19.61 ccw(c31.697,20.477) 32.31,19.864 cw(c33.015,19.159) 33.015,20.156 U3.11
  Bottom Layer w0.508: T3.1 v2(29.008,19.61)
NetT4_1: T4.1 U3.7 | length 3.3
  Top Layer w0.203: U3.7 34.996,21.041 cw(c35.451,21.041) 35.129,21.363 35.146,21.379 cw(c35.536,20.989) 35.536,21.54 35.829,21.54 cw(c35.829,21.158) 36.099,21.428 v2(36.247,21.281)
  Bottom Layer w0.508: v2(36.247,21.281) 36.944,21.281 cw(c36.944,20.346) T4.1
NetT5_1: T5.1 U3.8 | length 2.6
  Top Layer w0.254: U3.8 v2(34.596,21.515)
  Bottom Layer w0.508: v2(34.596,21.515) 34.973,21.138 cw(c33.736,19.902) T5.1
NetT6_1: T6.1 U3.9 | length 4.1
  Top Layer w0.203: v2(32.208,21.388) cw(c32.638,20.959) 32.638,21.566 33.656,21.566 cw(c33.656,21.075) 34.003,21.422 34.037,21.388 cw(c33.654,21.005) 34.196,21.005 U3.9
  Bottom Layer w0.508: v2(32.208,21.388) cw(c32.208,20.529) 32.815,21.137 T6.1
NetT7_1: T7.1 U3.10 | length 3.4
  Top Layer w0.254: v2(31.802,20.499) 32.003,20.499 ccw(c32.003,20.933) 32.31,20.626 cw(c32.745,20.191) 32.745,20.806 32.977,20.806 U3.10
  Bottom Layer w0.254: T7.1 ccw(c31.368,19.536) T7.1@31.802,19.536
  Bottom Layer w0.508: T7.1@31.802,19.536 v2(31.802,20.499)
pads on no net: U1.10 U1.21 U3.0 U3.2 U3.4 U3.6 U3.12 U3.13 U3.19 U3.20 U5.1 U5.3 U5.4 U5.6 U5.10 U5.11 U5.12 U5.13
copper on no net: | length 1.8
  Top Layer w0.203: 35.396,17.858 35.396,17.906
  Top Layer w0.254: 35.396,17.906 35.396,17.858 ccw(c35.823,17.858) 35.521,17.556 35.673,17.404 ccw(c35.866,17.597) 35.866,17.324 ; 36.448,17.324 ccw(c36.448,17.758) 36.755,17.451
  Top Layer w0.406: 35.866,17.324 36.448,17.324

## Polygon pours and split planes (outlines as drawn)
GND on Bottom Layer "Bottom Layer-No Net" (solid, remove dead copper, pour order 0): 0,20.88 44.502,20.88 44.502,18.086 45.01,17.578 48.058,17.578 48.566,18.086 48.566,21.134 56.694,21.134 56.694,14.022 56.694,0 0,0 0,20.88

## Keep-outs
Keep-Out Layer:
  the board outline again, w0.254

## Silkscreen, mask and mechanical layers (free items; w line width, h text height)
Top Overlay:
  circle w0.406: c50.268,19.102 r0.203
  text "RX" at 23.42,21.642 h1.52
  text "TX" at 25.198,21.642 h1.52
  text "G" at 27.611,21.642 h1.52
  text "3V" at 29.516,21.642 h1.52
  text "OUT" at 53.265,13.768 h1.52
  text "V-" at 54.408,11.101 h1.52
  text "V+" at 57.456,6.402 h1.52
  text "BLE+RADAR V1.1" at 26.341,1.068 h1.52
  text "2020.09.17" at 45.264,0.941 h1.52
Bottom Overlay:
  text "T14" at 57.202,14.403 h1.52
  text "T13" at 59.234,6.402 h1.52
Top Solder:
  lines w0.6: 25.691,1.24 25.691,10.15 25.7,16.15 38.101,16.15 38.101,11.018 ; 38.109,0.8 38.109,8.498 ; 43.909,0.998 43.909,7.998 ; 43.917,10.518 43.917,15.65 56.317,15.65 ; 56.309,1.11 56.317,7.11 ; 56.309,7.11 56.321,15.65

## Text inside footprints (layer, text, board x,y; h text height)
D1: Top Overlay "+" at 19.864,1.068 h1 r90